# Altium PCB SparkAway.PcbDoc
Units mm, origin at the board's own origin, x right, y up, seen from the top; angles counter-clockwise.
Board outline 20 x 15 mm, 2 copper layers (Top Layer, Bottom Layer); 7 components, 6 nets, 32 pads, 44 vias.
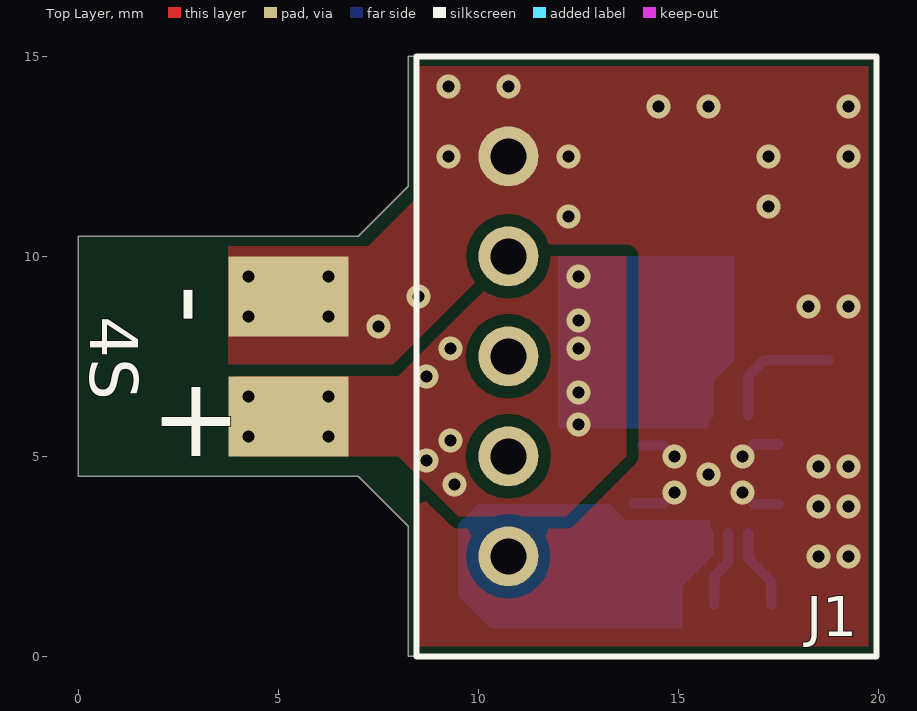
[diagram p0: Top Layer view]
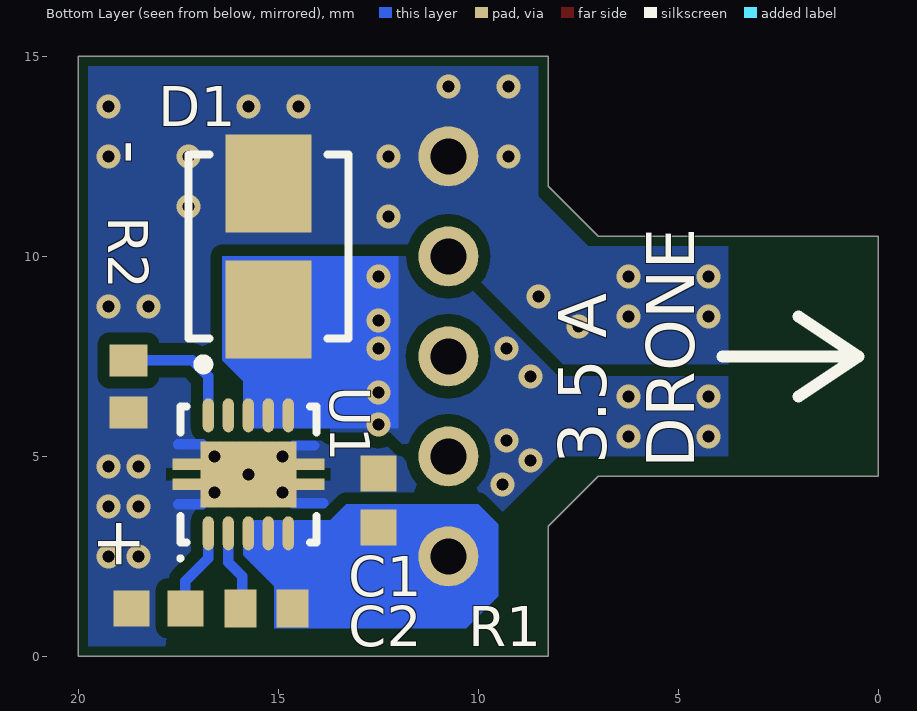
[diagram p1: Bottom Layer view, seen from below]

## Layer stack, top to bottom
Top Solder: solder mask 0.0102, Solder Resist, Dk 3.5
Top Layer: signal copper 0.0356
Dielectric 1: dielectric 0.32, FR-4, Dk 4.8
Bottom Layer: signal copper 0.0356
Bottom Solder: solder mask 0.0102, Solder Resist, Dk 3.5

## Board outline
0,4.5 0,10.5 7,10.5 8.25,11.75 8.25,15 20,15 20,0 8.25,0 8.25,3.25 7,4.5

## Design rules (kind name [scope] priority, off if disabled: settings)
Clearance [All] p1: gap=0.15 ignorepadtopadclearanceinfootprint=FALSE except(0.3: Arc-Fill Arc-Poly Arc-Region Track-Fill Track-Poly Track-Region SMDPad-Fill SMDPad-Poly SMDPad-Region THPad-Fill THPad-Poly THPad-Region Via-Fill Via-Poly Via-Region Fill-Fill Fill-Poly Fill-Region Poly-Poly Poly-Region Region-Region)
MinimumSolderMaskSliver [All] p1: minsoldermaskwidth=0
PolygonConnect [All] p1: connectstyle=Direct reliefconductorwidth=0.254 reliefentries=4 polygonreliefangle="90 Angle" airgapwidth=0.254
RoutingVias [All] p1: holewidth=0.3 width=0.6 viastyle="Through Hole" minholewidth=0.3 minwidth=0.6 maxholewidth=0.3 maxwidth=0.6
SolderMaskExpansion [All] p1: expansion=0.102
Width [All] p1: maxlimit=0.254 minlimit=0.254 preferedwidth=0.254
29 further rules are at their usual default settings.

## Components (designator, comment, footprint, x,y, rotation, side; value= is the part's Value field where it differs from the comment)
C1 "0.1 uF" CAPC1608X10L 12.5,3.9 r270 bottom
C2 "100 pF" CAPC1608X10L 18,1.2 r180 bottom
D1 "SMBJ16D-M3/H" "DO-214AA SMB DIOM4336X24N" 15.25,10.25 r90 bottom
J1 "S5B-XH-A(LF)(SN)" S5B-XH-A(LF)(SN) 10.75,7.5 r270 top locked
R1 "1 M" RESC1608X05N 15.3,1.2 r180 bottom
R2 "100 k" RESC1608X05N 18.75,6.75 r90 bottom
U1 "TPS259271DRCR" "TI S-PVSON-N10 SON50P300X100_HS-11N" 15.75,4.55 r90 bottom

## Footprints (in the part's own frame and the unit in brackets; to place one, negate y for a bottom-side part, rotate by r counter-clockwise, add the part's x,y. Pads: shape width x height; smd on the part's side, far side on the other; paste and mask are expansions set on the pad)
CAPC1608X10L [mm] "Chip Capacitor, 2-Leads, Body 1,60x0,80mm, IPC High Density"
  rect 0.9x0.9 smd: 1(-0.675,0) 2(0.675,0)
  body extent -0.9,-0.5 0.9,0.5, height 1
"DO-214AA SMB DIOM4336X24N" [mm] "Molded Diode, 2-Leads, Body 4.31x3.62mm, IPC Medium Density"
  rect 2.45x2.15 smd: 1(-1.575,0) 2(1.575,0)
  silkscreen extent -3.07,-2 2.3,2, body extent -2.29,-1.97 2.28,1.97, height 2.44
RESC1608X05N [mm] "Chip Resistor, 2-Leads, Body 1,57x0,85mm, IPC Medium Density"
  rect 0.8x0.95 smd: 1(-0.65,0) 2(0.65,0)
  body extent -0.83,-0.48 0.82,0.48, height 0.5
S5B-XH-A(LF)(SN) [mm] "JST XH SERIES 5 PIN RIGHT ANGLE"
  round 1.5 hole 0.9: 1(-5,0) 2(-2.5,0) 3(0,0) 4(2.5,0) 5(5,0)
  silkscreen extent -7.5,-2.3 7.5,9.2, body extent -7.45,-2.3 7.45,9.2, height 6.15
"TI S-PVSON-N10 SON50P300X100_HS-11N" [mm] "SON, 10-Leads, Body 3.00x3.00mm, Pitch 0.50mm, Thermal Pad 2.40x1.49mm, IPC Medium Density"
  oval 0.85x0.28 smd: 1(-1.475,1) 2(-1.475,0.5) 3(-1.475,0) 4(-1.475,-0.5) 5(-1.475,-1) 6(1.475,-1) 7(1.475,-0.5) 8(1.475,0) 9(1.475,0.5) 10(1.475,1)
  rect 0.28x0.7 smd paste-1: 11(-0.25,1.55) 11(-0.25,-1.55) 11(0.25,1.55) 11(0.25,-1.55)
  rect 1.65x2.4 smd paste-1: 11(0,0)
  silkscreen extent -2.15,-1.7 1.7,1.75, body extent -1.55,-1.55 1.55,1.55, height 1

## Part data
C1: library part CL10B104MB8NNNC, "CAP CER 0.1UF 50V X7R 0603", Capacitance=0.10µF, Manufacturer="Samsung Electro-Mechanics America, Inc.", Operating Temperature="-55°C ~ 125°C", Package / Case="0603 (1608 Metric)", Ratings=-, Supplier Part Number 1=1276-1941-1-ND, Temperature Coefficient=X7R, Tolerance=±20%, Voltage - Rated=50V, Applications="General Purpose", Category=Capacitors, ComponentLink1Description=http://www.samsungsem.com/kr/support/product-search/mlcc/__icsFiles/afieldfile/2016/08/18/S_CL10B104MB8NNNC.pdf, ComponentLink1URL=http://www.samsungsem.com/kr/support/product-search/mlcc/__icsFiles/afieldfile/2016/08/18/S_CL10B104MB8NNNC.pdf, Features=-, Height - Seated (Max)=-, Lead Spacing=-, Lead Style=-, Manufacturer Part Number=CL10B104MB8NNNC, Mounting Type="Surface Mount, MLCC", Packaging="Cut Tape (CT)", Part Status=Active, Pricing 1="1=0.1, 10=0.023, 25=0.0168, 50=0.0126, 100=0.0104, 250=0.00868, 500=0.0074, 1000=0.00581 (EUR)", RoHS="RoHS Compliant", Size / Dimension="0.063\" L x 0.031\" W (1.60mm x 0.80mm)", Stock 1=64597, Supplier 1=Digi-Key, Thickness (Max)="0.035\" (0.90mm)"
C2: library part CGA3E2C0G1H101J080AA, "Multilayer Ceramic Capacitors MLCC - SMD/SMT 0603 100pF 50volts C0G 5% T=0.8mm", Case Code - in=0603, Case Code - mm=1608, Dielectric="C0G (NP0)", Manufacturer=TDK, Maximum Operating Temperature="+ 125 C", Minimum Operating Temperature="- 55 C", Package/Case="0603 (1608 metric)", Supplier Part Number 1=810-CGA3E2C0G1H101J, Tolerance="5 %", Voltage Rating DC="50 VDC", Brand=TDK, Capacitance="100 pF", Category="Multilayer Ceramic Capacitors MLCC - SMD/SMT", ComponentLink1Description=http://www.mouser.com/ds/2/400/mlcc_automotive_general_en-269806.pdf, ComponentLink1URL=http://www.mouser.com/ds/2/400/mlcc_automotive_general_en-269806.pdf, Height="0.8 mm", Length="1.6 mm", Manufacturer Part Number=CGA3E2C0G1H101J080AA, Minimum Order Quantity=1, Packaging=Reel, Pricing 1="1=0.091, 10=0.049, 100=0.016, 1000=0.013, 4000=0.010, 8000=0.008, 48000=0.007 (EUR)", Product="Automotive MLCCs", Reeling=True, RoHS="RoHS Compliant", RoHS - Mouser=Y, Series=CGA, Standard Pack Qty=4000, Stock 1=27800, Supplier 1=Mouser, Termination Style=SMD/SMT, Type="Automotive Multilayer Ceramic Chip Capacitor", Width="0.8 mm"
D1: "TVS DIODE 16VWM 25.6VC DO214AA", Capacitance @ Frequency=-, Current - Peak Pulse (10/1000µs)=23.4A, Manufacturer="Vishay Semiconductor Diodes Division", Operating Temperature="-55°C ~ 150°C (TJ)", Package / Case="DO-214AA, SMB", Power - Peak Pulse=600W, Power Line Protection=No, Supplier Device Package="DO-214AA (SMBJ)", Supplier Part Number 1=SMBJ16D-M3/HGICT-ND, Voltage - Breakdown (Min)=18.1V, Voltage - Clamping (Max) @ Ipp=25.6V, Voltage - Reverse Standoff (Typ)=16V, Applications="General Purpose", Bidirectional Channels=-, Category="Circuit Protection", ComponentLink1Description=http://www.vishay.com/docs/87606/87606.pdf, ComponentLink1URL=http://www.vishay.com/docs/87606/87606.pdf, Manufacturer Part Number=SMBJ16D-M3/H, Mounting Type="Surface Mount", Packaging="Cut Tape (CT)", Part Status=Active, Pricing 1="1=0.34, 10=0.275, 25=0.2508, 100=0.1867, 250=0.16916 (EUR)", RoHS="RoHS Compliant", Stock 1=7542, Supplier 1=Digi-Key, Type=Zener, Unidirectional Channels=1
J1: "CONN HEADER XH SIDE 5POS 2.5MM", Color=Natural, Manufacturer="JST Sales America Inc.", Supplier Part Number 1=455-2242-ND, Category="Connectors, Interconnects", ComponentLink1Description=http://www.jst-mfg.com/product/pdf/eng/eXH.pdf, ComponentLink1URL=http://www.jst-mfg.com/product/pdf/eng/eXH.pdf, Connector Type="Header, Shrouded", Contact Finish=Tin, Contact Finish Thickness=-, Contact Mating Length=-, Contact Type="Male Pin", Fastening Type="Detent Lock", Features=-, Manufacturer Part Number=S5B-XH-A(LF)(SN), Mounting Type="Through Hole, Right Angle", Number of Positions=5, Number of Positions Loaded=All, Number of Rows=1, Packaging=Bulk, Part Status=Active, Pitch="0.098\" (2.50mm)", Pricing 1="1=0.29, 10=0.276, 100=0.1936, 500=0.16594, 1000=0.13827, 5000=0.11852, 10000=0.11062 (EUR)", RoHS="RoHS Compliant", Row Spacing=-, Stock 1=38810, Supplier 1=Digi-Key, Termination=Press-Fit
R1: library part CRCW06031M00FKEA, "Thick Film Resistors - SMD 1/10watt 1.0Mohms 1%", Case Code - in=0603, Case Code - mm=1608, Manufacturer="Vishay / Dale", Operating Temperature Range="- 55 C to + 155 C", Package/Case="0603 (1608 metric)", Power Rating="100 mW", Resistance="1 MOhms", Supplier Part Number 1=71-CRCW0603-1.0M-E3, Temperature Coefficient="100 PPM / K", Tolerance="1 %", Voltage Rating="75 V", Brand="Vishay / Dale", Category="Thick Film Resistors - SMD", ComponentLink1Description=http://www.mouser.com/ds/2/427/dcrcwe3-109170.pdf, ComponentLink1URL=http://www.mouser.com/ds/2/427/dcrcwe3-109170.pdf, Height="0.45 mm", Length="1.55 mm", Manufacturer Part Number=CRCW06031M00FKEA, Minimum Order Quantity=1, Packaging=Reel, Pricing 1="1=0.091, 10=0.040, 100=0.024, 500=0.019, 1000=0.016, 5000=0.005, 50000=0.004 (EUR)", Product="Thick Film Resistors SMD", Product Category="0603 Thick Film Chip Resistors", Reeling=True, RoHS="RoHS Compliant By Exemption", RoHS - Mouser=E, Series=CRCW, Standard Pack Qty=5000, Stock 1=156208, Supplier 1=Mouser, Termination Style=SMD/SMT, Width="0.85 mm"
R2: library part CRCW0603100KFKEA, "Thick Film Resistors - SMD 1/10watt 100Kohms 1%", Case Code - in=0603, Case Code - mm=1608, Manufacturer="Vishay / Dale", Operating Temperature Range="- 55 C to + 155 C", Package/Case="0603 (1608 metric)", Power Rating="100 mW", Resistance="100 kOhms", Supplier Part Number 1=71-CRCW0603-100K-E3, Temperature Coefficient="100 PPM / K", Tolerance="1 %", Voltage Rating="75 V", Brand="Vishay / Dale", Category="Thick Film Resistors - SMD", ComponentLink1Description=http://www.mouser.com/ds/2/427/dcrcwe3-109170.pdf, ComponentLink1URL=http://www.mouser.com/ds/2/427/dcrcwe3-109170.pdf, Height="0.45 mm", Length="1.55 mm", Manufacturer Part Number=CRCW0603100KFKEA, Minimum Order Quantity=1, Packaging=Reel, Pricing 1="1=0.091, 10=0.040, 100=0.024, 500=0.019, 1000=0.016, 5000=0.005, 50000=0.004 (EUR)", Product="Thick Film Resistors SMD", Product Category="0603 Thick Film Chip Resistors", Reeling=True, RoHS="RoHS Compliant By Exemption", RoHS - Mouser=E, Series=CRCW, Standard Pack Qty=5000, Stock 1=395641, Supplier 1=Mouser, Termination Style=SMD/SMT, Width="0.85 mm"
U1: "IC EFUSE 18V BFET DVR 5A 10VSON", Current - Output (Max)=5A, Current - Supply=420µA, Manufacturer="Texas Instruments", Operating Temperature="-40°C ~ 85°C", Package / Case="10-VFDFN Exposed Pad", Supplier Device Package="10-VSON (3x3)", Supplier Part Number 1=296-44973-1-ND, Voltage - Supply="4.5 V ~ 18 V", Applications="General Purpose", Category="Integrated Circuits (ICs)", ComponentLink1Description=http://www.ti.com/lit/ds/symlink/tps25927.pdf, ComponentLink1URL=http://www.ti.com/lit/ds/symlink/tps25927.pdf, Feature Pins=EN, Features="Auto Retry, OVP, Thermal Limit", Internal Switch(s)=Yes, Manufacturer Part Number=TPS259271DRCR, Mounting Type="Surface Mount", Number of Channels=1, Packaging="Cut Tape (CT)", Part Status=Active, Pricing 1="1=1.61, 10=1.444, 100=1.126, 500=0.9312, 1000=0.59388 (EUR)", Programmable Features="Current Limit, Slew Rate, UVLO", RoHS="RoHS Compliant", Stock 1=466, Supplier 1=Digi-Key, Type="Hot Swap Controller"

## Free pads (board coordinates)
  rect 3x2 smd: 6(5.25,6) 7(5.25,9)

## Via types
v1: diameter 0.6, hole 0.3, Top Layer to Bottom Layer, tented both sides, 44 vias

## Nets (pads, with @x,y where several pads share a name; then routed paths per layer and width w, separated by ;. In a path a pad name is that pad's centre, name@x,y a point inside that pad or via, vN(x,y) a via of type N, cw(c..) or ccw(c..) an arc to the next point about the centre after c; other vN are vias at no path point)
GND: C1.1 C2.1 D1.2 J1.1 pad.7 R2.1 U1.11 | length 4.1
  Bottom Layer w0.254: 13.877,3.827 14.627,3.827 v1(14.9,4.1) ; 14.1,5.273 14.627,5.273 v1(14.9,5) ; v1(16.6,4.1) 16.9,3.8 17.5,3.8 ; v1(16.6,5) 16.9,5.3 17.5,5.3
  other v1: 18.5,2.5 19.25,2.5 18.5,3.75 19.25,3.75 15.75,4.55 18.5,4.75 19.25,4.75 7.5,8.25 4.25,8.5 6.25,8.5 18.25,8.75 19.25,8.75 8.5,9 4.25,9.5 6.25,9.5 12.25,11 17.25,11.25 9.25,12.5 12.25,12.5 17.25,12.5 19.25,12.5 14.5,13.75 15.75,13.75 19.25,13.75 9.25,14.25 10.75,14.25
NetC1_2: C1.2 J1.5 R1.2 U1.3 U1.4 U1.5 | length 2.3
  Bottom Layer w0.254: R1.2 14.65,1.475 15.75,2.575 U1.3
NetC2_2: C2.2 U1.1 | length 2
  Bottom Layer w0.254: U1.1 16.75,2.45 17.325,1.875 C2.2@17.325,1.3
NetR1_1: R1.1 U1.2 | length 1.9
  Bottom Layer w0.254: R1.1@15.9,1.3 15.9,2 16.25,2.35 U1.2
NetR2_2: R2.2 U1.10 | length 3.1
  Bottom Layer w0.254: U1.10 16.75,7 17.15,7.4 R2.2
VDRONE: D1.1 pad.6 U1.6 U1.7 U1.8 | length 1.2
  Bottom Layer w0.254: U1.8 15.75,7.125 15.825,7.2
  other v1: 9.4,4.3 8.7,4.9 9.3,5.4 4.25,5.5 6.25,5.5 12.5,5.8 4.25,6.5 6.25,6.5 12.5,6.6 8.7,7 9.3,7.7 12.5,7.7 12.5,8.4 12.5,9.5
pads on no net: J1.2 J1.3 J1.4 U1.9

## Polygon pours and split planes (outlines as drawn)
GND on Top Layer "Top Layer-No Net" (solid, remove dead copper, pour order 8): 3.75,10.25 3.75,4.75 8.25,4.75 8.5,4.5 8.5,0.25 19.75,0.25 19.75,14.75 8.5,14.75 8.5,11.5 7.25,10.25
VDRONE on Top Layer "Top Layer-No Net" (solid, pour order 0): 4,7 8,7 9.5,8.5 11,10 13.7,10 13.7,5 12.2,3.5 9.5,3.5 8,5 4,5
GND on Bottom Layer "Top Layer-No Net" (solid, remove dead copper, pour order 6): 3.75,10.25 3.75,4.75 7.25,4.75 8.5,3.5 8.5,0.25 19.75,0.25 19.75,14.75 8.5,14.75 8.5,11.5 7.25,10.25
VDRONE on Bottom Layer "Top Layer-No Net" (solid, pour order 2): 8,7 9.5,8.5 11,10 13.7,10 13.7,5.6 12.2,5.6 11.9,5.3 11.9,3.2 9.8,3.2 8,5 3.75,5 3.75,7

## Other copper
Bottom Layer:
  pour cut-out: 14.6,4.7 13.7,4.7 13.7,4.4 14.6,4.4
  pour cut-out: 16.9,4.7 17.8,4.7 17.8,4.4 16.9,4.4
  region net VDRONE: 15.75,5.7 15.75,6.75 16.4,7.4 16.4,10 12,10 12,5.7
  region net NetC1_2: 15.8,3.4 13.7,3.4 13.3,3.8 10,3.8 9.5,3.3 9.5,1.5 10.3,0.7 15.1,0.7 15.1,1.925 15.8,2.625

## Silkscreen, mask and mechanical layers (free items; w line width, h text height)
Top Overlay:
  text "4S" at 0.3,8.5 h1.2 r270
  text "-" at 3.5,8.3 h2 r90
  text "+" at 1.8,5 h2
Bottom Overlay:
  lines w0.3: 2,6.5 0.5,7.5 ; 2,8.5 0.5,7.5 ; 3.9,7.5 0.5,7.5
  text "-" at 19.2,12.9 h1.2 r90
  text "3.5 A" at 6.8,4.8 h1.2 r270
  text "DRONE" at 4.6,4.7 h1.2 r270
  text "+" at 19.5,3.5 h1.2 r90
Mechanical 2:
  the board outline again, w0.2

## Text inside footprints (layer, text, board x,y; h text height)
J1: Mechanical 1 "BOARD EDGE" at 18.65,11.9 h1 r270